# EAGLE board PCB_BIT_LED_RV01 (EAGLE 6.3)
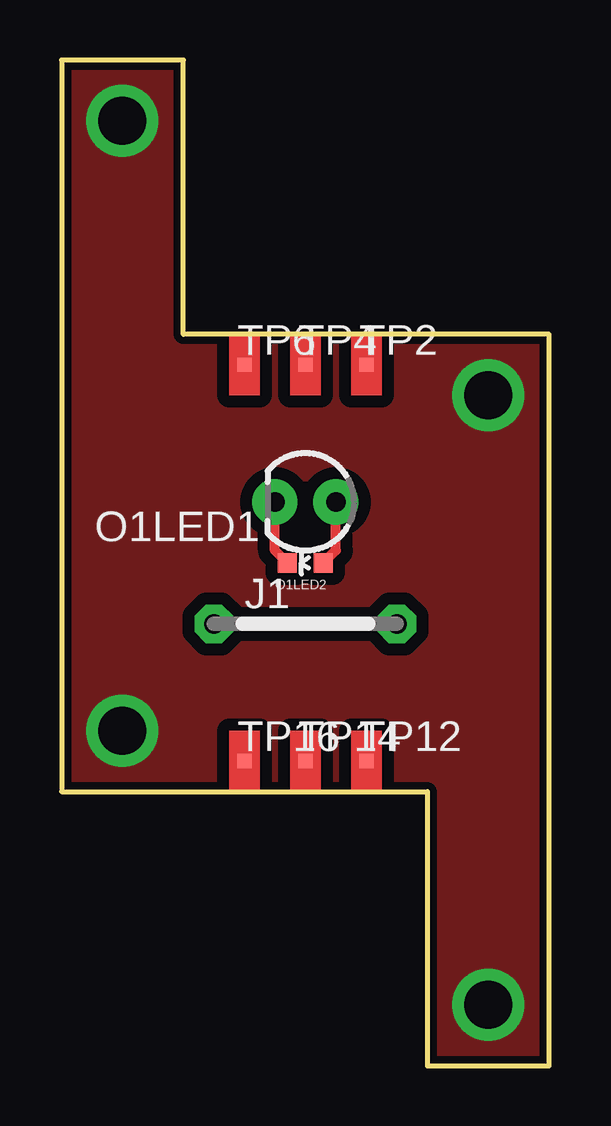
[diagram p0: board, top side]
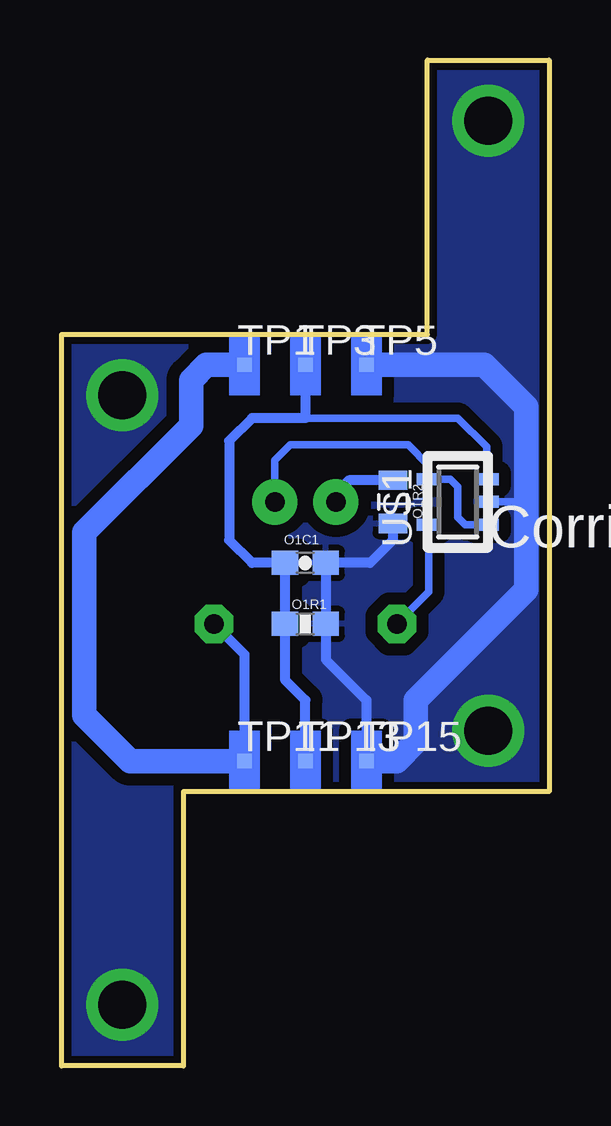
[diagram p1: board, bottom side, seen from below]

Size 20.32 x 41.91 mm. Coordinates in mm from the lower left corner, seen from the top.
Outline: 20.32,0 20.32,30.48 5.08,30.48 5.08,41.91 0,41.91 0,11.43 15.24,11.43 15.24,0 20.32,0
Copper layers (1*16): Top 0.035mm / dielectric 1.5mm / Bottom 0.035mm
Design rules "default *": minimum track width 8mil, minimum drill 20mil, track to track 20mil, track to pad 20mil, pad to pad 20mil, via to via 20mil, smd to smd 8mil, copper to edge 8mil, drill to drill 8mil, minimum pad ring 12mil, minimum via ring 10mil, stop-mask expansion 4mil, vias tented up to drill 20mil, thermal gap 10mil

## Footprints (pad centres in the part's own frame; a part is rotated, then mirrored left to right if it is on the bottom)
07 = drill 0.813 pad 1.6 octagon: 1 -3.81,0; 2 3.81,0
0603-CAP = smd 1.1 x 1: 1 -0.85,0; 2 0.85,0
LED3MM = drill 0.813 pad 1.88: A -1.27,0; K 1.27,0
LED-0603 = smd 0.8 x 0.8: A 0,-0.75; C 0,0.75
0603-RES = smd 1.1 x 1: 1 -0.85,0; 2 0.85,0
0805 = smd 0.8 x 1.2: 1 -0.9,0; 2 0.9,0
TP06SQ = smd 0.6 x 0.6: TP 0,0
SOT23-5 = smd 0.5 x 1: 1 -0.95,-1.2; 2 0,-1.2; 3 0.95,-1.2; 4 0.95,1.2; 5 -0.95,1.2

## Placement (x,y rotation side)
J1  J7MM  [07]  10.16,18.41 0 top
O1C1  0.1uF  [0603-CAP]  10.16,20.95 0 bottom
O1LED1  GREEN  [LED3MM]  10.16,23.5 180 top
O1LED2  GREEN  [LED-0603]  10.16,20.95 90 top
O1R1  1M  [0603-RES]  10.16,18.41 180 bottom
O1R2  330  [0805]  6.51,23.5 270 bottom
TP1  TPSQTP06SQ  [TP06SQ]  12.7,29.21 0 bottom
TP2  TPSQTP06SQ  [TP06SQ]  12.7,29.21 0 top
TP3  TPSQTP06SQ  [TP06SQ]  10.16,29.21 0 bottom
TP4  TPSQTP06SQ  [TP06SQ]  10.16,29.21 0 top
TP5  TPSQTP06SQ  [TP06SQ]  7.62,29.21 0 bottom
TP6  TPSQTP06SQ  [TP06SQ]  7.62,29.21 0 top
TP11  TPSQTP06SQ  [TP06SQ]  12.7,12.7 0 bottom
TP12  TPSQTP06SQ  [TP06SQ]  12.7,12.7 0 top
TP13  TPSQTP06SQ  [TP06SQ]  10.16,12.7 0 bottom
TP14  TPSQTP06SQ  [TP06SQ]  10.16,12.7 0 top
TP15  TPSQTP06SQ  [TP06SQ]  7.62,12.7 0 bottom
TP16  TPSQTP06SQ  [TP06SQ]  7.62,12.7 0 top
U$1  ZXLD1350  [SOT23-5]  3.81,23.5 90 bottom

## Library data of the parts
J1 = jumper
O1C1 O1LED1 O1LED2 O1R1 O1R2 = SparkFun
TP1-TP6 TP11-TP16 = testpad
U$1 = zetex; MPN: ZXLD1350ET5; OC_FARNELL: 1226470; OC_NEWARK: 05M2175

## Nets
GND: O1C1.2 O1R1.1 O1R2.2 TP5.TP TP15.TP U$1.2
LEDGND: O1LED1.K O1LED2.C O1R2.1
N$1: O1LED1.A O1LED2.A U$1.1 U$1.4
SIG: O1C1.1 O1R1.2 TP3.TP TP13.TP U$1.3
VCC: J1.1 J1.2 TP1.TP TP11.TP U$1.5

## Tracks (layer width: path | path; a pad name or v marks a point on that pad's centre or on a via)
GND  (via drill 2)
  Bottom 0.305: U$1.2 1.27,23.5
  Bottom 0.406: 1.27,23.5 0.95,23.81 | O1R2.2 6.51,21.91 7.46,20.95 O1C1.2 O1R1.1 9.31,16.93 7.62,15.24 TP15.TP
  Bottom 1.016: TP5.TP 2.7,29.21 0.95,27.46 0.95,23.81 0.95,19.84 5.56,15.24 5.56,13.49 6.35,12.7 TP15.TP
  other vias: 2.54,39.37 2.54,13.97 17.78,27.94 17.78,2.54
  pour Top (isolate 0.305): 0,41.91 20.32,41.91 20.32,0 0,0
  pour Bottom (isolate 0.305): 0,41.91 0,0 20.32,0 20.32,41.91
LEDGND
  Top 0.406: O1LED2.C 8.89,21.48 O1LED1.K
  Bottom 0.406: O1R2.1 8.36,24.39 8.89,23.87 O1LED1.K
N$1
  Top 0.406: O1LED2.A 11.43,21.48 O1LED1.A
  Bottom 0.305: O1LED1.A 11.43,25.24 10.79,25.88 5.87,25.88 5.01,25.01 U$1.4 4.12,24.45 3.81,24.13 3.81,22.86 3.5,22.55 U$1.1
SIG
  Bottom 0.305: 10.16,26.99 3.81,26.99 2.61,25.79 U$1.3
  Bottom 0.406: TP3.TP 10.16,26.99 12.38,26.99 13.34,26.04 13.34,21.91 12.38,20.95 O1C1.1 O1R1.2 11.01,16.09 10.16,15.24 TP13.TP
VCC
  Top 0.406: J1.1 J1.2
  Bottom 0.305: J1.1 5.01,19.75 U$1.5
  Bottom 0.406: J1.2 12.7,17.14 TP11.TP
  Bottom 1.016: TP11.TP 17.46,12.7 19.37,14.61 19.37,22.23 14.92,26.67 14.92,28.57 14.29,29.21 TP1.TP
(copper drawn outside any net)
  shapes: Bottom area x6, Top area x6

## Text on the board
Top: TOP
Bottom: BOTTOM
bPlace: Corrigir